# Altium PCB ESP32_USBCv1.PcbDoc (part 3 of 3)
Units mil, origin at the board's own origin, x right, y up, seen from the top; angles counter-clockwise.
Board outline 2700 x 1000 mil, 4 copper layers (L1, L2, L3, L4), stack 86.385 mil thick; 65 components, 73 nets, 301 pads, 160 vias.
Unrouted connection lines stored in the file: 5.
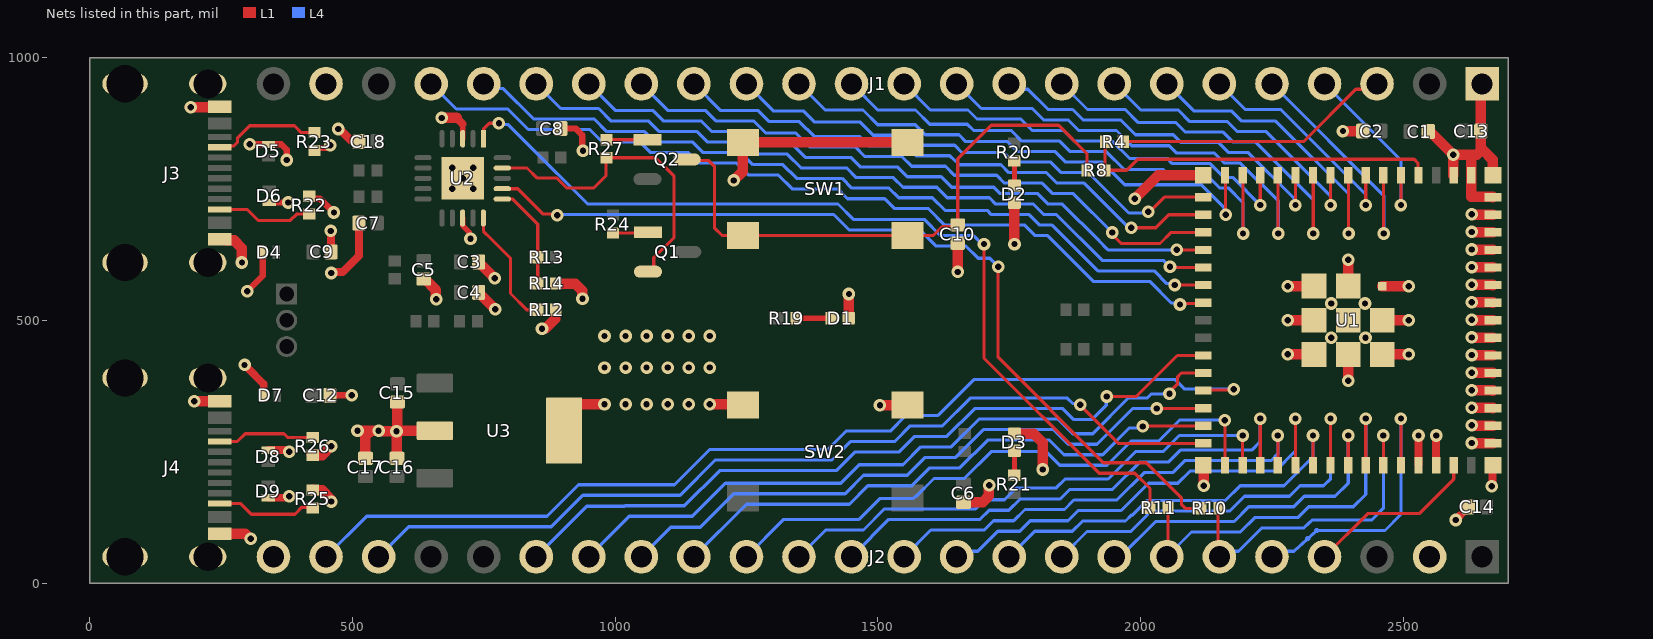
[diagram p4: the nets of this part, all layers, seen from the top]

## Via types
v1: diameter 24, hole 12, L1 to L4, tented both sides, 160 vias

## Nets (pads, with @x,y where several pads share a name; then routed paths per layer and width w, separated by ;. In a path a pad name is that pad's centre, name@x,y a point inside that pad or via, vN(x,y) a via of type N, cw(c..) or ccw(c..) an arc to the next point about the centre after c; other vN are vias at no path point) (continued)
GND: C1.1 C2.1 C3.1 C4.1 C5.1 C6.1 C7.1 C8.1 C9.1 C10.2 C12.1 C13.1 C14.1 C15.1 C16.1 C17.1 C18.1 D1.1 D2.1 D3.1 D4.1 D5.1 D6.1 D7.1 D8.1 D9.1 J1.1 J1.23 J2.2 J2.24 J3.A1B12 J3.B1A12 J3.S1 J3.S2 J3.S3 J3.S4 J4.A1B12 J4.B1A12 J4.S1 J4.S2 J4.S3 J4.S4 R12.2 R14.1 R22.2 R23.2 R25.2 R26.2 SW1.3 SW1.4 SW2.3 SW2.4 U1.1 U1.2 U1.42 U1.43 U1.46 U1.47 U1.48 U1.49 U1.50 U1.51 U1.52 U1.53 U1.54 U1.55 U1.56 U1.57 U1.58 U1.59 U1.60 U1.61 U1.62 U1.63 U1.64 U1.65 U1.66 U1.67 U1.68 U1.69 U1.70 U1.71 U1.72 U1.73 U2.3 U2.13 U2.21 U3.2 U3.4 | length 4671.6
  L1 w6: U1.43@2561.18,225.59 U1.43@2562.36,224.41 ; v1(2630,266.54) v1@2630.39,266.14 ; U1.46@2670.24,266.14 U1.46@2670.6,265.78
  L1 w10.01: U2.13@710,694.59 710,680.2 722.32,667.88 722.32,657.68 v1(725,655)
  L1 w10.1: U2.3@710,845.41 710,873.28
  L1 w12: v1(300,555) 329.53,584.53 329.53,629.91 D4.1@328.64,630.8 ; v1(305,835) 305.17,834.83 D5.1@339.21,834.83 ; D5.1@340.5,834.66 364.66,834.66 375,824.33 v1(375,805) ; D6.1@341.84,724.3 341.99,724.15 377.85,724.15 v1(378,724) ; R22.2@418,736.01 422.63,731.38 438.62,731.38 v1(465,705) ; R23.2@428,822.99 432.63,827.62 449.37,827.62 454.75,833 v1(458,833) ; C12.1@457.38,357.06 v1(498.94,357.06) ; C8.1@896.94,864.72 897.22,865 925,865 937.58,852.42 937.58,823.78 v1(938.93,822.42)
  L1 w15: v1(295,415) 300,410 331.61,378.39 D7.1@331.61,362.3 ; D9.1@340,162.2 348.96,162.2 377.2,162.2 v1(380,165) ; D8.1@340,252.8 376.12,252.8 378.92,250 v1(380,250) ; v1(459,670) 459.32,669.68 459.32,630.32 C9.1@459.65,630 ; v1(460,590) 461.72,591.72 481.72,591.72 512.68,622.68 C7.1@512.68,685 ; v1(473,864) 475.44,864 498.37,841.06 501.61,841.06 502.68,840 C18.1@512.68,840 ; 698.28,885 710,873.28 ; U1.42@2528.9,224.41 v1(2528.93,280.8) ; U1.43@2562.36,224.41 v1(2562.39,280.8) ; v1(2600,120) 2600,120.75 2618.5,139.25 C14.1@2618.5,140.83 ; v1(2668,184) 2669.32,185.32 2669.32,223.09 U1.65@2670.63,224.41
  L1 w20: v1@190.96,905.17 191.33,905.54 249.29,905.54 J3.A1B12@248.92,905.91 ; v1(198.96,346.06) J4.A1B12@247.64,346.06 ; J4.B1A12@247.64,94.09 295.82,94.09 300,89.92 305.92,84 v1(307,84) ; J3.B1A12@247.64,653.94 258.46,653.94 260.28,652.13 274.95,652.13 290,637.08 v1(290,610) ; R26.2@423.19,243.62 442.54,243.62 458.92,260 v1(460,260) ; R25.2@425,177.01 425.63,176.38 442.34,176.38 459.23,159.48 459.23,155.77 v1(460,155) ; v1(510,290) 536,290 ; C17.1@525,237.32 525,279 536,290 ; C16.1@585,237.32 584.5,237.82 584.5,288.5 v1(584,289) ; v1@585,290 585.5,289.5 656.47,289.5 U3.2@656.97,290 ; C15.1@585.66,344.35 585.66,291.75 584,290.08 v1(584,289) ; C5.1@636,578.68 637.57,578.68 659.23,557.02 659.23,540.77 v1(660,540) ; v1(670,885) 698.28,885 ; C4.1@740.32,552.68 740.32,551.43 742.92,548.83 744.17,548.83 v1(772,521) ; C3.1@740.32,610.68 740.32,609.43 742.92,606.83 744.17,606.83 v1(771,580) ; v1(861,484) 861.77,484.77 868.48,484.77 886.38,502.66 886.38,519.37 R12.2@887.01,520 ; R14.1@887.01,570 887.01,569.82 887.64,569.19 924.28,569.19 937.23,556.24 937.23,541.77 v1(938,541) ; U3.4@903.03,290 903.03,315.55 927.48,340 v1(980,340) ; v1(1180,340) 1242.09,340 SW2.4@1243.5,338.58 ; v1(1226,766.08) 1243,783.08 1243,838.08 SW1.4@1243.5,838.58 SW1.3@1556.5,838.58 1557.58,838.58 SW1.3@1558,839 ; D1.1@1444.49,504 1444.75,504.25 1444.75,549.75 v1(1445,550) ; v1(1504,338) 1504.29,338.29 1556.2,338.29 SW2.3@1556.5,338.58 ; v1(1652,592) 1652,646 C10.2@1652.68,646.68 ; C10.2@1652,646.68 C10.2@1652.68,646.68 ; C10.2@1653,647 C10.2@1652.68,646.68 ; C6.1@1663,153.68 1699.28,153.68 1711.23,165.63 1711.23,185.23 v1(1712,186) ; D3.1@1760,284.34 1796.66,284.34 1814,267 v1@1814,217.08 ; v1(1760,645) D2.1@1760,723.66 ; v1(1989,731) 2033.59,775.59 U1.63@2119.45,775.59 ; v1(2120,185) U1.64@2120,223.86 ; v1(2280,565) v1(2280,565) U1.72@2330.08,564.96 ; v1@2280.04,435.04 U1.70@2330.08,435.04 ; v1(2280,500.04) U1.71@2330.08,500 ; v1(2385,860) C2.1@2422.68,860 ; v1(2395,384.96) U1.69@2395.04,435.04 ; U1.73@2395.04,564.96 v1@2395.04,615 ; U1.68@2460,435.04 v1@2510.04,435.04 ; U1.67@2460,500 v1@2510.04,500 ; U1.66@2460,564.96 v1@2510.04,564.96 ; C1.1@2549.44,857.18 2549.44,855.6 2550.05,855 2555,855 2595.21,814.79 2595.41,815 2629.65,815 2639.84,815 2649.92,825.08 2670,805 2670,776.22 U1.62@2670.63,775.59 ; U1.2@2595.41,775.59 v1@2595.41,814.59 ; C14.1@2618.5,140.83 2620.08,140.83 2622.68,143.43 C14.1@2622.68,145 ; U1.1@2629.29,775.59 U1.1@2629.65,775.24 ; 2629.65,809.14 U1.1@2629.65,775.24 ; v1(2630,300) 2630.39,299.61 2670.24,299.61 U1.47@2670.63,299.21 ; v1(2630,333.46) 2630.39,333.07 2670.24,333.07 U1.48@2670.63,332.68 ; v1(2630,366.93) 2630.39,366.54 2670.24,366.54 U1.49@2670.6,366.17 ; v1(2630,400.39) 2630.39,400 2670.24,400 U1.50@2670.63,399.61 ; v1(2630,433.86) 2630.39,433.46 2670.24,433.46 U1.51@2670.63,433.07 ; v1(2630,467.32) 2630.39,466.93 2670.24,466.93 U1.52@2670.6,466.57 ; v1(2630,500.79) 2630.39,500.39 2670.24,500.39 U1.53@2670.63,500 ; v1(2630,534.25) 2630.39,533.86 2670.24,533.86 U1.54@2670.63,533.46 ; v1(2630,567.72) 2630.39,567.32 2670.24,567.32 U1.55@2670.6,566.96 ; v1(2630,601.18) 2630.39,600.79 2670.24,600.79 U1.56@2670.63,600.39 ; v1(2630,634.65) 2630.39,634.25 2670.24,634.25 U1.57@2670.63,633.86 ; v1(2630,668.11) 2630.39,667.72 2670.24,667.72 U1.58@2670.6,667.35 ; v1(2630,701.57) 2630.39,701.18 2670.24,701.18 U1.59@2670.63,700.79 ; v1@2630.39,266.14 U1.46@2670.24,266.14 ; 2647.32,822.48 2647.32,947.32 J1.1@2650,950 ; U1.60@2670.63,734.25 2670.24,734.65 2630.39,734.65 2629.65,735.39 U1.1@2629.65,775.24 ; 536,290 v1(550,290) 550.77,289.23 583.77,289.23 v1(584,289)
  other v1: 1814,216 1020,340 1060,340 1100,340 1140,340 980,410 1020,410 1060,410 1100,410 1140,410 1180,410 2280,435.08 2510.08,435 2363,467 2428,467 980,470 1020,470 1060,470 1100,470 1140,470 1180,470 2510.08,499.96 2363,532 2427,532 2510.08,564.92 2395.08,615.04 690,750 730,750 710,770 690,790 730,790 2595,815 192.59,905.17
GPIO0: R4.2 R8.2 U1.4 | length 689.1
  L1 w6: R8.2@1932.01,785 R8.2@1932.5,785.49 ; R4.2@1932.99,840 1935,840 1932.5,837.5 R8.2@1932.5,785.49 ; U1.4@2528.9,775.59 2527.61,776.87 2527.61,799.14 2520.42,806.34 1994.34,806.34 1973.49,785.49 R8.2@1932.5,785.49
GPIO1: J1.4 U1.5 | length 349.5
  L1 w6: v1(2495.43,719.17) U1.5@2495.43,775.59
  L4 w6: J1.4@2350,950 2495.43,804.57 2495.43,720.57 2496.83,719.17 v1(2495.43,719.17)
GPIO2: J1.5 U1.6 | length 484
  L1 w6: U1.6@2461.97,775.59 2462.34,775.22 2462.34,665.37 v1(2462.72,665)
  L4 w6: J1.5@2250,950 2462.72,737.28 v1(2462.72,665)
GPIO3: J1.6 U1.7 | length 445.4
  L1 w6: v1(2428.5,719.17) U1.7@2428.5,775.59
  L4 w6: J1.6@2150,950 2150,945 2153,942 2158,942 2199,901 2267,901 2428,740 2428,719.67 v1(2428.5,719.17)
GPIO4: J1.7 U1.8 | length 618.8
  L1 w6: U1.8@2395.04,775.59 2395.41,775.22 2395.41,665.37 v1(2395.79,665)
  L4 w6: J1.7@2050,950 2102,898 2173.72,898 2192.72,879 2257,879 2395.79,740.21 v1(2395.79,665)
GPIO5: J1.8 U1.9 | length 573.7
  L1 w6: v1(2361.57,719.17) U1.9@2361.57,775.59
  L4 w6: J1.8@1950,950 2000,900 2071.72,900 2093.72,878 2165.43,878 2184.43,859 2239,859 2361.11,736.89 2361.11,719.63 v1(2361.57,719.17)
GPIO6: J1.9 U1.10 | length 745.4
  L1 w6: U1.10@2328.11,775.59 2328.48,775.22 2328.48,665.37 v1(2328.86,665)
  L4 w6: J1.9@1850,950 1899,901 1970.72,901 1995.72,876 2067.43,876 2085.43,858 2157.15,858 2176.15,839 2219,839 2328.86,729.14 v1(2328.86,665)
GPIO7: J1.10 U1.11 | length 702.6
  L1 w6: v1(2294.65,719.17) U1.11@2294.65,775.59
  L4 w6: J1.10@1750,950 1760.33,939.67 1785.33,939.67 1824,901 1870.72,901 1890.72,881 1962.43,881 1990.43,853 2062.15,853 2077.15,838 2148.86,838 2167.86,819 2205,819 2291.97,732.03 2291.97,721.85 v1(2294.65,719.17)
GPIO8: J1.11 U1.12 | length 877.2
  L1 w6: U1.12@2261.18,775.59 2261.56,775.22 2261.56,665.37 v1(2261.93,665)
  L4 w6: J1.11@1650,950 1697,903 1793.72,903 1815.72,881 1862.43,881 1882.43,861 1954.15,861 1983.15,832 2054.86,832 2068.86,818 2140.58,818 2159.58,799 2190,799 2261.93,727.07 v1(2261.93,665)
GPIO9: J1.12 U1.13 | length 829.7
  L1 w6: v1(2227.72,719.17) U1.13@2227.72,775.53
  L4 w6: J1.12@1550,950 1600,900 1671.72,900 1688.72,883 1772,883 1794,861 1854.15,861 1874.15,841 1945.86,841 1978.86,808 2050.58,808 2060.58,798 2132.29,798 2158.46,771.83 2175.05,771.83 v1(2227.72,719.17)
GPIO10: J1.13 U1.14 | length 1010
  L1 w6: U1.14@2194.25,775.59 2194.63,775.22 2194.63,665.37 v1(2195,665)
  L4 w6: J1.13@1450,950 1450,947 1451,946 1454,946 1500,900 1571.72,900 1598.72,873 1670.43,873 1682.43,861 1754.15,861 1774.15,841 1845.86,841 1865.86,821 1935,821 1969,787 2043.29,787 2052.29,778 2124.01,778 2150.18,751.83 2166.77,751.83 2195,723.6 v1(2195,665)
GPIO11: J1.14 U1.15 | length 996.5
  L1 w6: U1.15@2160.79,775.59 2161.39,774.98 2161.39,701.61 v1(2162,701)
  L4 w6: J1.14@1350,950 1400,900 1471.72,900 1499.72,872 1571.43,872 1590.43,853 1654.43,853 1667.43,840 1746.86,840 1765.86,821 1837.58,821 1857.58,801 1926.72,801 1969.72,758 2115.73,758 2159.32,714.41 2159.32,703.68 v1(2162,701)
GPIO12: J1.15 U1.16 | length 983.9
  L1 w6: v1(2014.39,706.32) 2017.32,706.32 2045.25,734.25 U1.16@2119.45,734.25
  L4 w6: J1.15@1250,950 1302,898 1359,898 1380,877 1466.43,877 1491.43,852 1562,852 1581,833 1646.15,833 1660.15,819 1739.58,819 1757.58,801 1829.29,801 1849.29,781 1900.82,781 1977.82,704 2012.07,704 v1(2014.39,706.32)
GPIO13: J1.16 U1.17 | length 1093.8
  L1 w6: v1(1982,676) 2029,676 2053.79,700.79 U1.17@2119.45,700.79
  L4 w6: J1.16@1150,950 1150,949 1152,947 1153,947 1201,899 1272.72,899 1293.72,878 1350.72,878 1378.72,850 1465.15,850 1483.79,831.36 1554.36,831.36 1572.72,813 1637,813 1647,803 1647.86,803 1654.86,796 1734.29,796 1749.29,781 1821.01,781 1841.01,761 1892.53,761 1969.53,684 1970.21,684 1978.21,676 v1(1982,676)
GPIO14: J1.17 U1.18 | length 1207
  L1 w6: v1(1946,667) 1946,663.21 1963.21,646 2037,646 2058.32,667.32 2110.32,667.32 2111,668 2118.77,668 U1.18@2119.45,667.32
  L4 w6: J1.17@1050,950 1101,899 1172.72,899 1192.72,879 1264.43,879 1287.22,856.22 1344.22,856.22 1370.43,830 1456.86,830 1475.51,811.36 1546.07,811.36 1564.43,793 1628.72,793 1645.72,776 1726.01,776 1741.01,761 1812.73,761 1832.73,741 1872,741 v1(1946,667)
GPIO15: J1.18 U1.19 | length 1300.5
  L1 w6: v1(2069,634) 2069.07,633.93 U1.19@2119.45,633.86 U1.19@2119.45,633.86
  L4 w6: J1.18@950,950 1001,899 1072.72,899 1092.72,879 1164.43,879 1184.43,859 1256.15,859 1278.93,836.22 1335.93,836.22 1362.15,810 1448.58,810 1467.22,791.36 1537.79,791.36 1556.15,773 1620.43,773 1640.43,753 1720.73,753 1732.73,741 1804.44,741 1824.44,721 1851,721 1921,651 1921,650.82 1936.82,635 1937,635 1938,634 v1(2069,634)
GPIO16: J1.19 U1.20 | length 1414.3
  L1 w6: v1(2056,602) 2057.3,600.7 2119.15,600.7 U1.20@2119.45,600.39
  L4 w6: J1.19@850,950 897,903 968.72,903 992.72,879 1064.43,879 1084.43,859 1156.15,859 1176.15,839 1247.86,839 1270.65,816.22 1327.65,816.22 1353.86,790 1440.29,790 1458.94,771.36 1529.51,771.36 1547.86,753 1612.15,753 1632.15,733 1712.44,733 1724.44,721 1796.16,721 1816.16,701 1840,701 1927,614 2043.14,614 2055.14,602 v1(2056,602)
GPIO17: J1.20 U1.21 | length 1528.1
  L1 w6: v1(2065,567) v1(2065,567) 2119.41,566.96 U1.21@2119.45,566.93
  L4 w6: J1.20@750,950 759.23,940.77 787.23,940.77 845,883 960.43,883 984.43,859 1056.15,859 1076.15,839 1147.86,839 1167.86,819 1239.58,819 1262.36,796.22 1319.36,796.22 1345.58,770 1432.01,770 1450.65,751.36 1521.22,751.36 1539.58,733 1603.86,733 1627.86,709 1708.16,709 1716.16,701 1787.87,701 1807.87,681 1831.72,681 1918.72,594 2025.82,594 2050.14,569.68 2062.32,569.68 v1(2065,567)
GPIO18: J1.21 U1.22 | length 1644.9
  L1 w6: v1(2075,530) 2076.73,531.73 2117.72,531.73 U1.22@2119.45,533.46
  L4 w6: J1.21@650,950 698,902 796,902 823,875 835,863 952.15,863 976.15,839 1047.86,839 1067.86,819 1139.58,819 1159.58,799 1231.29,799 1254.08,776.22 1311.08,776.22 1337.29,750 1423.73,750 1442.37,731.36 1512.94,731.36 1531.29,713 1595.58,713 1627.58,681 1779.59,681 1799.59,661 1823,661 1910,574 2017.53,574 2058.85,532.68 2072.32,532.68 v1(2075,530)
GPIO21: J2.19 U1.25 | length 1454.5
  L1 w6: v1(1935.89,355) 1992,355 2070.07,433.07 U1.25@2119.45,433.07
  L4 w6: J2.19@850,50 946,146 1017.72,146 1018.72,147 1132,147 1199,214 1421,214 1456,249 1540.1,249 1570.1,279 1631.36,279 1684.22,331.86 1852.14,331.86 1873,311 1907.43,311 1934.57,338.14 1934.57,353.68 v1(1935.89,355)
GPIO26: J2.18 U1.26 | length 1347.2
  L1 w6: v1(2055,360) 2055,363.79 2070.54,379.32 2070.54,392.54 2077.61,399.61 U1.26@2119.45,399.61
  L4 w6: J2.18@950,50 1027,127 1147,127 1210,190 1429.43,190 1464.43,225 1548,225 1582,259 1639.65,259 1692.51,311.86 1843.14,311.86 1870.86,284.14 1908.86,284.14 1976.72,352 2012.82,352 2020.82,360 v1(2055,360)
GPIO33: J2.17 U1.28 | length 1201.4
  L1 w6: v1(2031,332) 2031.34,332.34 2110.98,332.34 U1.28@2111.32,332.68
  L4 w6: J2.17@1050,50 1106,106 1162,106 1226,170 1437.72,170 1472.72,205 1556.28,205 1590.28,239 1647.93,239 1700.79,291.86 1834.86,291.86 1862.57,264.14 1917.14,264.14 1985,332 v1(2031,332)
GPIO34: J2.16 U1.29 | length 1096.2
  L1 w6: v1(2004,298) 2004.61,298.61 2118.84,298.61 U1.29@2119.45,299.21
  L4 w6: J2.16@1150,50 1151,50 1151,51 1250,150 1446,150 1481,185 1564.57,185 1598.57,219 1656.22,219 1709.07,271.86 1826.57,271.86 1854.29,244.14 1927.72,244.14 1978.9,295.32 2001.32,295.32 v1(2004,298)
GPIO35: J2.15 U1.31 | length 1125.1
  L1 w6: v1(2160,310) 2160.76,309.24 U1.31@2160.79,224.41
  L4 w6: J2.15@1250,50 1321,121 1464.43,121 1504.43,161 1568,161 1572,165 1572.85,165 1606.85,199 1664.5,199 1715.5,250 1820.15,250 1846.01,224.14 1936.01,224.14 1982.18,270.32 2034.32,270.32 2074,310 v1(2160,310)
GPIO36: J2.14 U1.32 | length 996.2
  L1 w6: U1.32@2194.25,224.41 v1(2194.25,280.77)
  L4 w6: J2.14@1350,50 1401,101 1472.72,101 1512.72,141 1686.15,141 1703.56,158.41 1741.13,158.41 1763.72,181 1839.58,181 1856.58,198 1938.15,198 1990.47,250.32 2043.32,250.32 2073.77,280.77 v1(2194.25,280.77)
GPIO37: J2.13 U1.33 | length 1003.6
  L1 w6: U1.33@2227.72,224.41 v1(2227.69,312.94)
  L4 w6: J2.13@1450,50 1450,55 1455,55 1521,121 1694.43,121 1711.84,138.41 1749.41,138.41 1771,160 1846.86,160 1864.86,178 1946.43,178 1998.43,230 2052.72,230 2075.72,253 2211.36,253 2227.69,269.33 v1(2227.69,312.94)
GPIO38: J2.12 U1.34 | length 883.5
  L1 w6: U1.34@2261.18,224.41 v1(2261.18,280.77)
  L4 w6: J2.12@1550,50 1601,101 1702.72,101 1720.13,118.41 1758.41,118.41 1780,140 1855.15,140 1873.15,158 1954.72,158 2006.72,210 2061,210 2084,233 2248.14,233 2261.18,246.04 v1(2261.18,280.77)
GPIO39: J2.11 U1.35 | length 878.3
  L1 w6: U1.35@2294.65,224.41 v1(2294.61,312.94)
  L4 w6: J2.11@1650,50 1660.33,60.33 1690.33,60.33 1728.41,98.41 1770.13,98.41 1790.13,118.41 1861.84,118.41 1881.43,138 1963,138 2015,190 2071,190 2094,213 2256.43,213 2294.61,251.19 v1(2294.61,312.94)
GPIO40: J2.10 U1.36 | length 753.9
  L1 w6: U1.36@2328.11,224.41 v1(2328.11,280.77)
  L4 w6: J2.10@1750,50 1798.41,98.41 1870.13,98.41 1889.72,118 1971.28,118 1982.28,129 1984,129 2012,157 2161.43,157 2189.43,185 2273,185 2328.11,240.11 v1(2328.11,280.77)
GPIO41: J2.9 U1.37 | length 786
  L1 w6: U1.37@2361.54,224.38 v1(2361.54,312.94) v1@2361.54,320
  L4 w6: J2.9@1850,50 1850,55 1855,55 1898,98 1981.28,98 2020.28,137 2169.72,137 2197.72,165 2283.43,165 2303.43,185 2348,185 2361.54,198.54 v1(2361.54,312.94)
GPIO42: J2.8 U1.38 | length 656.7
  L1 w6: U1.38@2395.04,224.41 v1(2395.04,280.77)
  L4 w6: J2.8@1950,50 1961.57,50 2028.57,117 2178,117 2206,145 2291.72,145 2311.72,165 2370,165 2395.04,190.04 2395.04,275.04 2397.9,277.9 2400,280 2399.23,280.77 v1(2395.04,280.77)
GPIO45: J2.5 U1.41 | length 556.2
  L1 w6: U1.41@2495.43,224.41 v1(2495.4,312.94)
  L4 w6: J2.5@2250,50 2260.33,60.33 2291.96,60.33 2318.08,84.5 ; 2318.25,84.66 2334.99,99.99 2465,100 2495.4,130.4 v1(2495.4,312.94) v1@2490.18,318.16
  L4 w10: 2318.08,84.5 cw(c2350,50) 2318.25,84.66
GPIO46: J2.4 U1.44 | length 333.7
  L1 w6: J2.4@2350,50 2432,132 2530.05,132 2595.83,197.78 U1.44@2595.83,224.41
GPIO47: J2.23 U1.27 | length 1943.3
  L1 w6: U1.27@2119.45,366.14 2120.88,367.57 2175.57,367.57 v1(2177,369)
  L4 w6: v1(2177,369) 2084.18,369 2066.18,387 1682.8,387 1614.8,319 1553.53,319 1523.53,289 1439.43,289 1404.43,254 1180,254 1113,187 930.43,187 870.57,127.14 527.14,127.14 J2.23@450,50 ; J2.23@450,50 450,49 447,46 447,47 J2.23@450,50
GPIO48: J2.22 U1.30 | length 1730.7
  L1 w6: v1(1885,339) 1885,338 1957.25,265.75 U1.30@2119.45,265.75
  L4 w6: J2.22@550,50 607.14,107.14 878.86,107.14 938.72,167 1123.72,167 1190.72,234 1412.72,234 1447.72,269 1531.82,269 1561.82,299 1623.08,299 1675.94,351.86 1860.43,351.86 1870.61,341.68 1882.32,341.68 v1(1885,339)
GPIO_BUTTON: C10.1 Q2.3 R8.1 SW1.1 SW1.2 | length 1108.1
  L1 w6: Q2.3@1136.42,806 1136.42,807.42 1138,809 1143.14,803.86 1178.14,803.86 1189,793 1189,676 1203.58,661.42 SW1.1@1556.5,661.42 1605.99,661.42 1622.83,678.26 1648.93,678.26 C10.1@1652,681.32 1652,807 1716,871 1844,871 1897.99,817.01 R8.1@1897.99,785
GPIO_CONN: J1.3 R4.1 | length 528.6
  L1 w6: R4.1@1967.01,840 2310,840 2409.67,939.67 2439.67,939.67 J1.3@2450,950
NetD1_2: D1.2 R19.1 | length 67.7
  L1 w10.01: R19.1@1344.16,504 D1.2@1411.82,504
NetD2_2: D2.2 R20.1 | length 46.7
  L1 w10.01: D2.2@1760,756.34 R20.1@1760,802.99
NetD3_2: D3.2 R21.1 | length 46.7
  L1 w10.01: R21.1@1760,205.01 D3.2@1760,251.66
NetJ3_A5: J3.A5 R23.1 | length 207.3
  L1 w6: J3.A5@247.64,829.13 248.54,830.04 269.26,830.04 271.13,831.91 274.83,831.91 281.28,838.36 281.28,846.28 305,870 390,870 402.99,857.01 R23.1@428,857.01
NetJ3_B5: J3.B5 R22.1 | length 184
  L1 w6: J3.B5@247.64,711.02 299.63,711.02 320.65,690 382.18,690 394.18,701.99 R22.1@418,701.99
NetJ4_A5: J4.A5 R26.1 | length 186.4
  L1 w6: J4.A5@247.64,269.29 281.29,269.29 296.01,284.01 369.99,284.01 376.99,277.01 R26.1@425,277.01
NetJ4_B5: J4.B5 R25.1 | length 189.3
  L1 w6: J4.B5@247.64,151.18 287.82,151.18 308,131 321,131 391,131 404.05,144.05 419.05,144.05 R25.1@422,146.99
NetQ1_1: Q1.1 R24.2 | length 76.6
  L1 w6: R24.2@992.01,665 992.01,667.01 995,670 995,668.84 997.64,666.2 1061.38,666.2 Q1.1@1062.58,667.4
NetQ2_1: Q2.1 R27.2 | length 77.9
  L1 w6: R27.2@983.66,843.36 Q2.1@1061.58,843.4
NetR12_1: R12.1 U2.15 | length 229.8
  L1 w6: U2.15@749.37,694.59 749.37,669.63 764,655 801,618 801,551 832,520 R12.1@852.99,520
"RTS FTDI": Q1.2 R27.1 U2.19 | length 609.7
  L1 w6: U2.19@785.41,789.68 832.51,789.68 851.2,771 888.55,771 907.55,752 959.9,752 982.86,774.96 R27.1@982.86,813.85 ; R27.1@983.66,809.35 1076.65,809.35 1112.27,773.73 1112.27,657.44 1073.69,618.86 1073.69,598.38 1067.91,592.6 Q1.2@1062.58,592.6
"RXD FTDI": R11.1 U2.1 | length 1731.9
  L1 w6: U2.1@749.37,856.94 749.37,863.37 760.91,874.91 778.91,874.91 v1(779,875) ; v1(1702,645) 1702,428 1921,209 1989,209 2017.99,180.01 R11.1@2017.99,143
  L4 w6: v1(779,875) 781.68,872.32 796.74,872.32 819.5,849.56 819.5,849.5 835,834 947.79,721.21 1424.23,721.21 1453.44,692 1588.29,692 1619.29,661 1682.21,661 1698.21,645 v1(1702,645)
"TXD FTDI": R10.1 U2.17 | length 1691.2
  L1 w6: U2.17@785.41,750.32 814.69,750.32 863,702 888,702 v1(890,700) ; v1(1729,602) 1729,429.28 1929.28,229 2011,229 2077.64,162.36 2077.64,149.65 2085.28,142 R10.1@2114.99,142
  L4 w6: v1(890,700) 891.21,701.21 1415.95,701.21 1445.16,672 1580.01,672 1611.01,641 1667.82,641 1690.82,618 1713,618 v1(1729,602)
U0RXD: J2.6 R10.2 U1.40 | length 638.6
  L1 w6: R10.2@2147.01,140 2147.01,52.99 J2.6@2150,50 ; U1.40@2461.97,224.41 v1(2461.97,280.77)
  L4 w6: J2.6@2150,50 2160.33,60.33 2186.33,60.33 2231,105 2310.85,105 2321.16,114.44 2326.71,120 2440,120 2461.97,141.97 2461.97,274.3 2461.27,275 2460,275 2461.97,276.97 v1(2461.97,280.77)
U0TXD: J2.7 R11.2 U1.39 | length 754.4
  L1 w6: J2.7@2050,50 2052.01,52.01 R11.2@2052.01,143 ; U1.39@2428.5,224.41 v1(2428.47,312.94)
  L4 w6: J2.7@2050,50 2097,97 2190,97 2218,125 2300,125 2320,145 2405,145 2428.47,168.47 v1(2428.47,312.94)
"VBUS SENSE": R13.1 R14.2 U2.16 | length 200.3
  L1 w6: U2.16@785.41,730.63 805.37,730.63 852.99,683.01 R13.1@852.99,620 R14.2@852.99,570
pads on no net: J1.24 J3.A8 J3.B8 J4.A8 J4.B8 U2.2 U2.4 U2.5 U2.6 U2.7 U2.14

## Polygon pours and split planes (outlines as drawn)
GND on L1 "GND_L01_P009" (solid, remove dead copper, pour order 9): 760,390 880,390 960,470 980,490 1190,490 1200,480 1200,390 1210,380 1280,380 1290,370 1290,296 1214,220 780,220 737,263 613,263 600,250 600,228 597,225 510,225 510,260 497,273 497,307 540,350 566,350 573,357 603,357 610,350 610,337 707,337
+3V3 on L1 "+3V3_L01_P004" (solid, remove dead copper, pour order 4): 510,150 522,138 608,138 641,171 683,171 693,181 693,215 510,215
GND on L1 "GND_L01_P008" (solid, remove dead copper, pour order 8): 2267,630 2267,370 2523,370 2523,630
+5V_VBUS2 on L1 "+5V_VBUS2_L01_P007" (solid, remove dead copper, pour order 7): 350,301 387,301 435,301 435,441 406,470 361,470 350,459
+5V_VBUS1 on L1 "+5V_VBUS1_L01_P006" (solid, remove dead copper, pour order 6): 347,530 437,530 437,675 347,675
+5V on L1 "+5V_L01_P005" (solid, remove dead copper, pour order 5): 693,405 703,395 703,365 693,355 625,355 613,367 527,367 414,480 365,480 353,492 353,507 366,520 448,520 563,405 623,405 626,405
"+3V3 FTDI" on L1 "+3V3_FTDI_L01_P003" (solid, remove dead copper, pour order 3): 535,699 535,584 554,565 590,565 595,570 595,587 592,590 561,590 559,592 559,663 570,674 600,704 600,711 593,718 586,718 567,699
"+3V3 FTDI" on L1 "+3V3_FTDI_L01_P001" (solid, remove dead copper, pour order 1): 782.08,829.32 789,826 825,826 854,797 874.08,797 874.08,882 863.08,882 862.08,881 823.08,881 793.08,851 787.08,851 782.08,846
+3V3 on L1 "+3V3_L01_P000" (solid, remove dead copper, pour order 0): 2444,848 2444,872 2450,878 2455,878 2458,881 2458,899 2468,909 2505,909 2512,902 2514,900 2514,878 2516,876 2526,876 2526,847 2521,842 2450,842
GND on L2 "GND_L02_P017" (solid, remove dead copper, pour order 17): 2686,16 2686,985 13,985 13,16
+3V3 on L2 "+3V3_L02_P016" (solid, remove dead copper, pour order 16): 2685,18 2685,985 930,985 890,945 890,795 925,760 990,760 1025,760 1055,790 2075,790 2430,790 2595,790 2595,270 2525,200 2382,200 2305,123 2305,24 2311,18
+3V3 on L2 "+3V3_L02_P012" (solid, remove dead copper, pour order 12): 509,151 526,134 632,134 677,179 694,196 694,215 695,216 524,216 509,201
GND on L3 (split plane): 2699.95,0.05 0.05,0.05 0.05,999.95 2699.95,999.95

## Silkscreen, mask and mechanical layers (free items; w line width, h text height)
Top Overlay:
  lines w6: 750,110 750,135 ; 750,875 750,900 ; 1250,110 1250,126 ; 1250,877 1250,889 ; 1750,110 1750,135 ; 1750,865 1750,890 ; 2250,110 2250,135 ; 2250,860 2250,885
  text "J1" at 2311,841 h40
  text "VB1" at 1716,636 h40
  text "BOOT/USER" at 1231,566 h40
  text "VB1" at 436,536 h40
  text "UART" at 26,521 h40
  text "3V3" at 1506,486 h40
  text "5V" at 436,481 h40
  text "ESP" at 31,431 h40
  text "VB2" at 441,421 h40
  text "RESET" at 1311,391 h40
  text "VB2" at 1706,336 h40
  text "J2" at 2311,131 h40
Bottom Overlay:
  text "GND" at 2675,885 h40 r90
  text "NC" at 369,879 h40 r90
  text "GND" at 469.26,879 h40 r90
  text "5V" at 569.52,879 h40 r90
  text "GPIO18" at 669.78,879 h40 r90
  text "GPIO17" at 770.04,879 h40 r90
  text "GPIO16" at 870.3,879 h40 r90
  text "GPIO15" at 970.56,879 h40 r90
  text "GPIO14" at 1070.83,879 h40 r90
  text "GPIO13" at 1171.09,879 h40 r90
  text "GPIO12" at 1271.35,879 h40 r90
  text "GPIO11" at 1371.61,879 h40 r90
  text "GPIO10" at 1471.87,879 h40 r90
  text "GPIO9" at 1572.13,879 h40 r90
  text "GPIO8" at 1672.39,879 h40 r90
  text "GPIO7" at 1772.65,879 h40 r90
  text "GPIO6" at 1872.91,879 h40 r90
  text "GPIO5" at 1973.17,879 h40 r90
  text "GPIO4" at 2073.43,879 h40 r90
  text "GPIO3" at 2173.69,879 h40 r90
  text "GPIO2" at 2273.96,879 h40 r90
  text "GPIO1" at 2374.22,879 h40 r90
  text "GPIO0" at 2474.48,879 h40 r90
  text "+3V3" at 2574.74,879 h40 r90
  text "CUSTOM ESP32 DevKit" at 1782.43,554.01 h40
  text "(C) AYUSH ZADE 2026/07/28" at 1650,506.66 h40
  text "GPIO47" at 425.26,121 h40 r270
  text "GPIO48" at 525.52,121 h40 r270
  text "USB_N" at 632.45,121 h40 r270
  text "USB_P" at 732.71,121 h40 r270
  text "GPIO21" at 826.31,121 h40 r270
  text "GPIO26" at 926.57,121 h40 r270
  text "GPIO33" at 1026.83,121 h40 r270
  text "GPIO34" at 1127.09,121 h40 r270
  text "GPIO35" at 1227.35,121 h40 r270
  text "GPIO36" at 1327.61,121 h40 r270
  text "GPIO37" at 1427.87,121 h40 r270
  text "GPIO38" at 1528.13,121 h40 r270
  text "GPIO39" at 1628.39,121 h40 r270
  text "GPIO40" at 1728.65,121 h40 r270
  text "GPIO41" at 1828.91,121 h40 r270
  text "GPIO42" at 1929.17,121 h40 r270
  text "U0TXD" at 2029.44,121 h40 r270
  text "U0RXD" at 2129.7,121 h40 r270
  text "GPIO45" at 2229.96,121 h40 r270
  text "GPIO46" at 2330.22,121 h40 r270
  text "CHIP_UP" at 2437.14,121 h40 r270
  text "GND" at 2530.74,121 h40 r270
  text "3V3" at 2631,121 h40 r270
  text "GND" at 325,115 h40 r270
Board Shape:
  lines w20: 0,0 2700,0 2700,1000 0,1000

## Text inside footprints (layer, text, board x,y; h text height)
J1: Bottom Overlay "1" at 2636,1066 h40 r270
J2: Bottom Overlay "1" at 2631,-29 h40 r270
J5: Top Overlay "1" at 301,531 h40